# Altium PCB PCB1.PcbDoc
Units mm, origin at the board's own origin, x right, y up, seen from the top; angles counter-clockwise.
Board outline 47.79 x 53 mm, 2 copper layers (Top Layer, Bottom Layer); 28 components, 36 nets, 120 pads, 8 vias.
Unrouted connection lines stored in the file: 3.
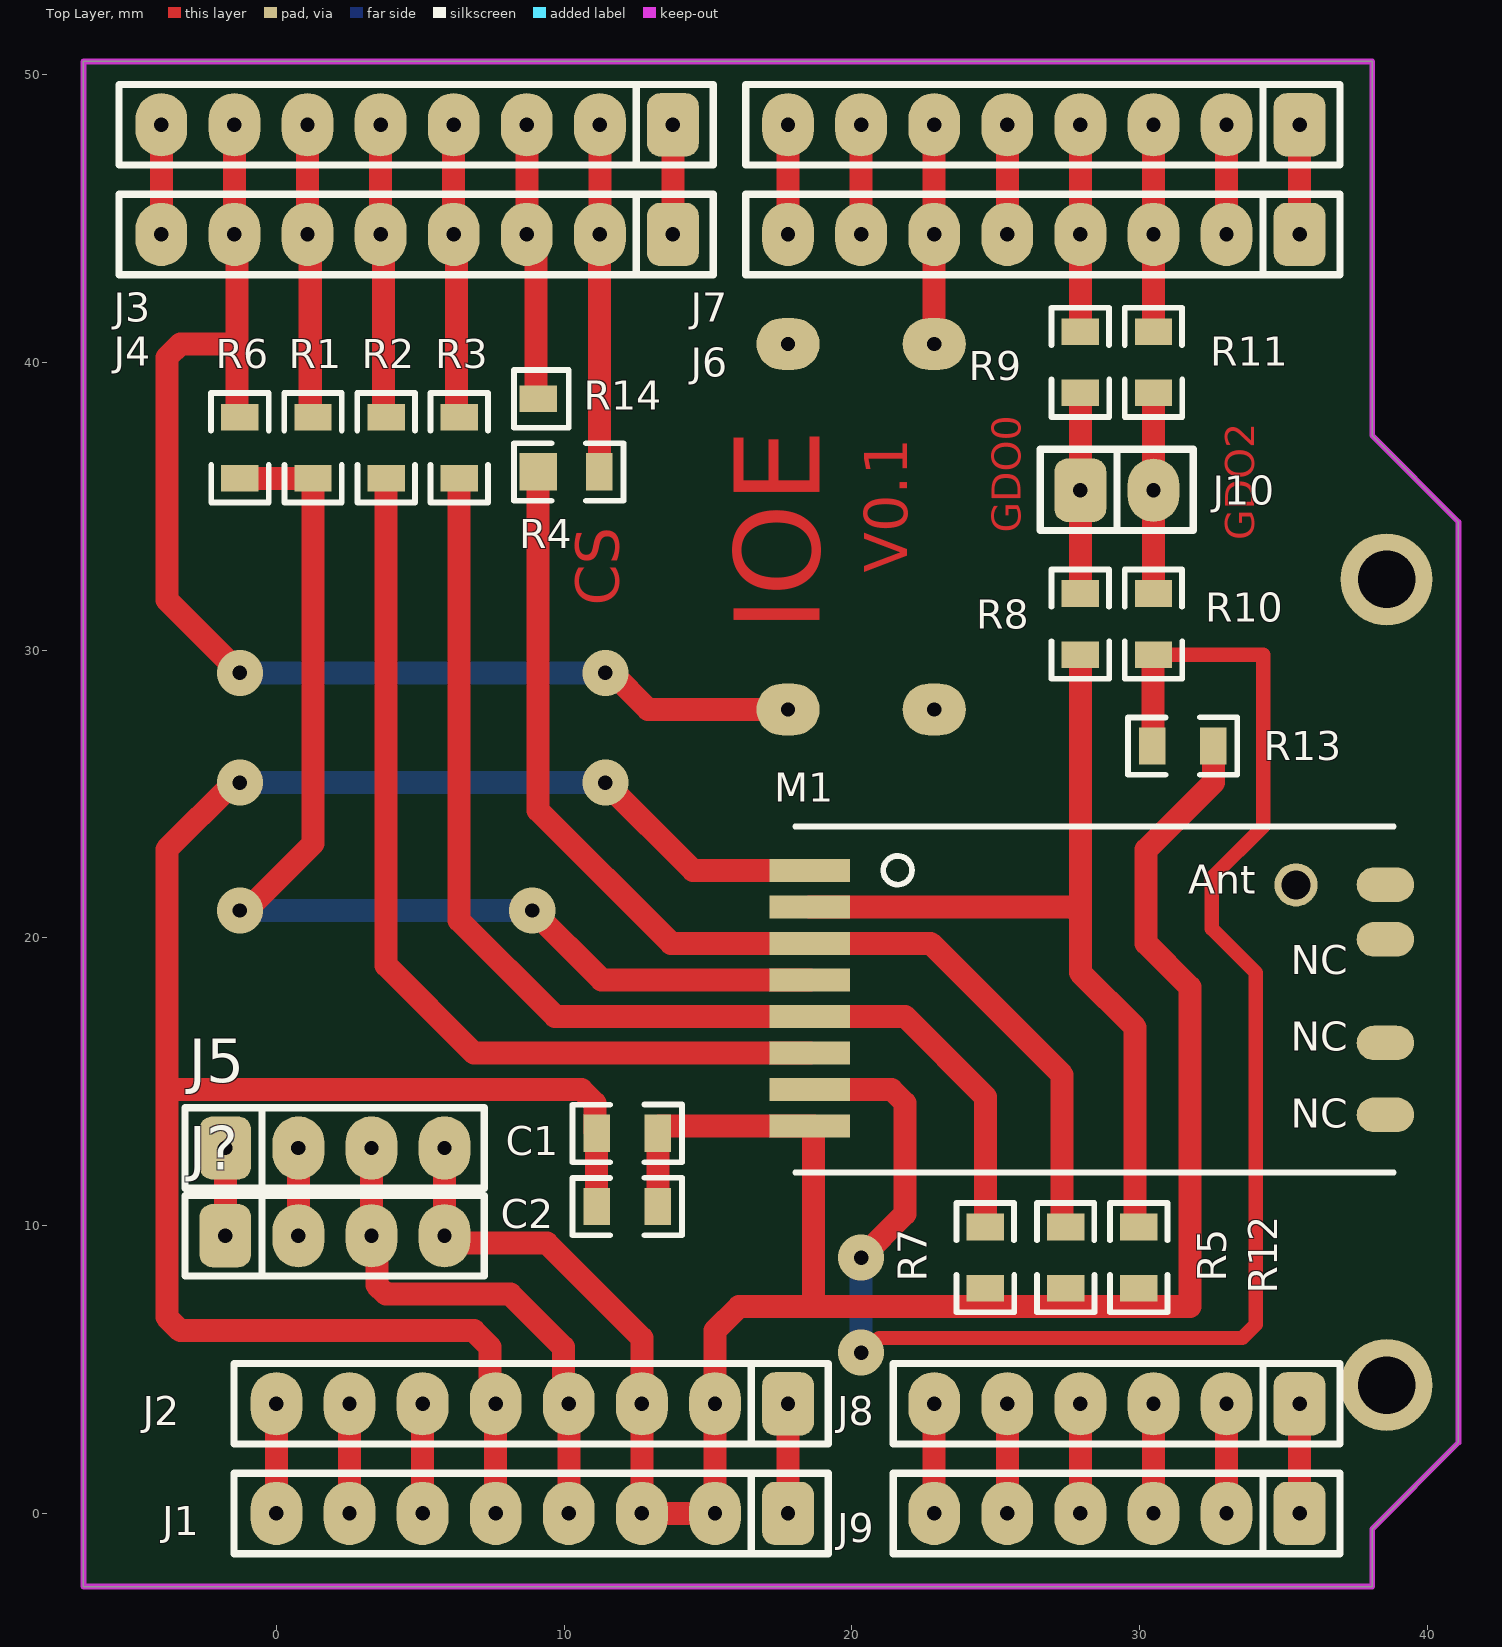
[diagram p0: Top Layer view]
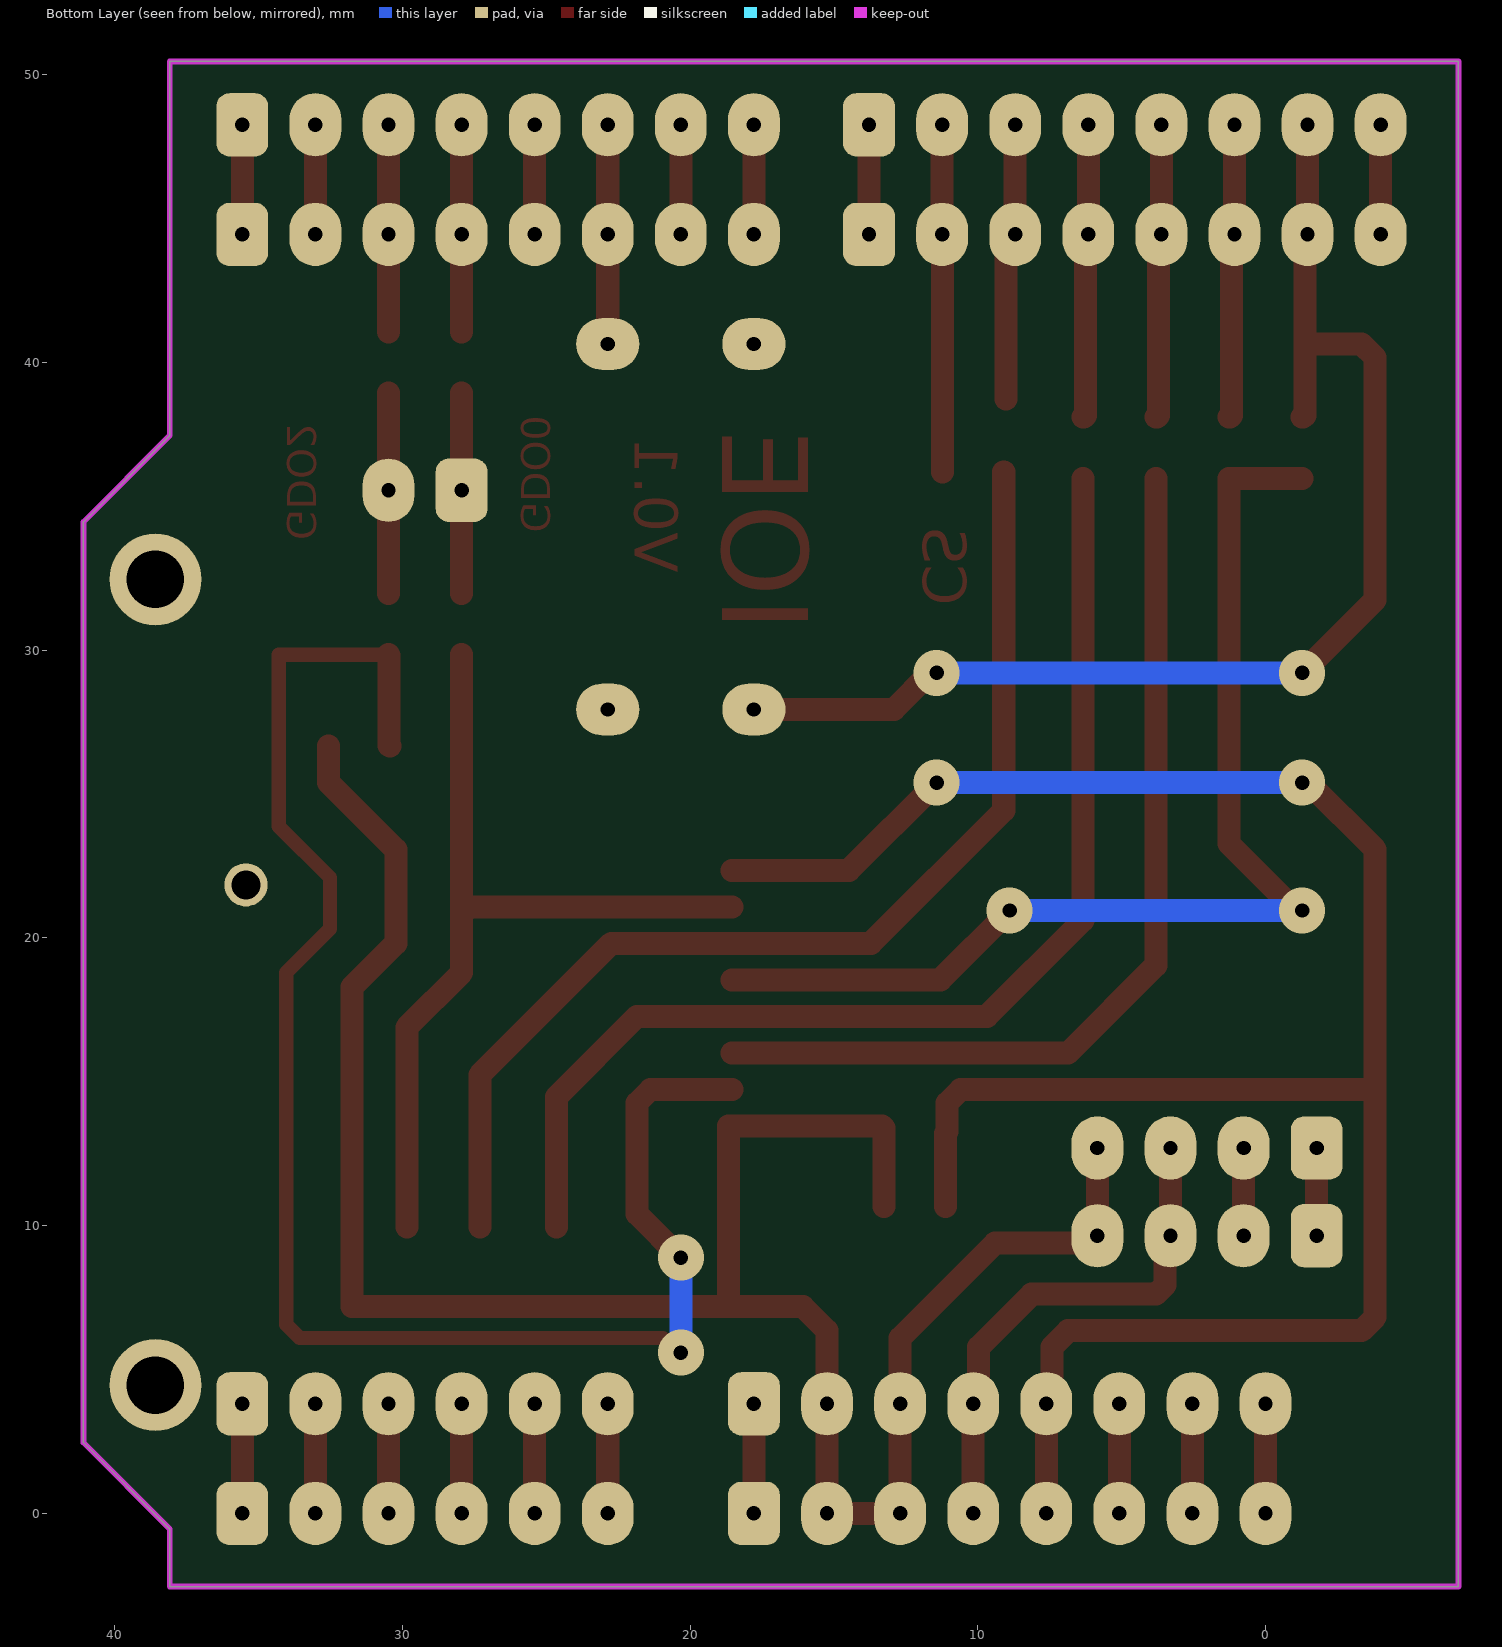
[diagram p1: Bottom Layer view, seen from below]
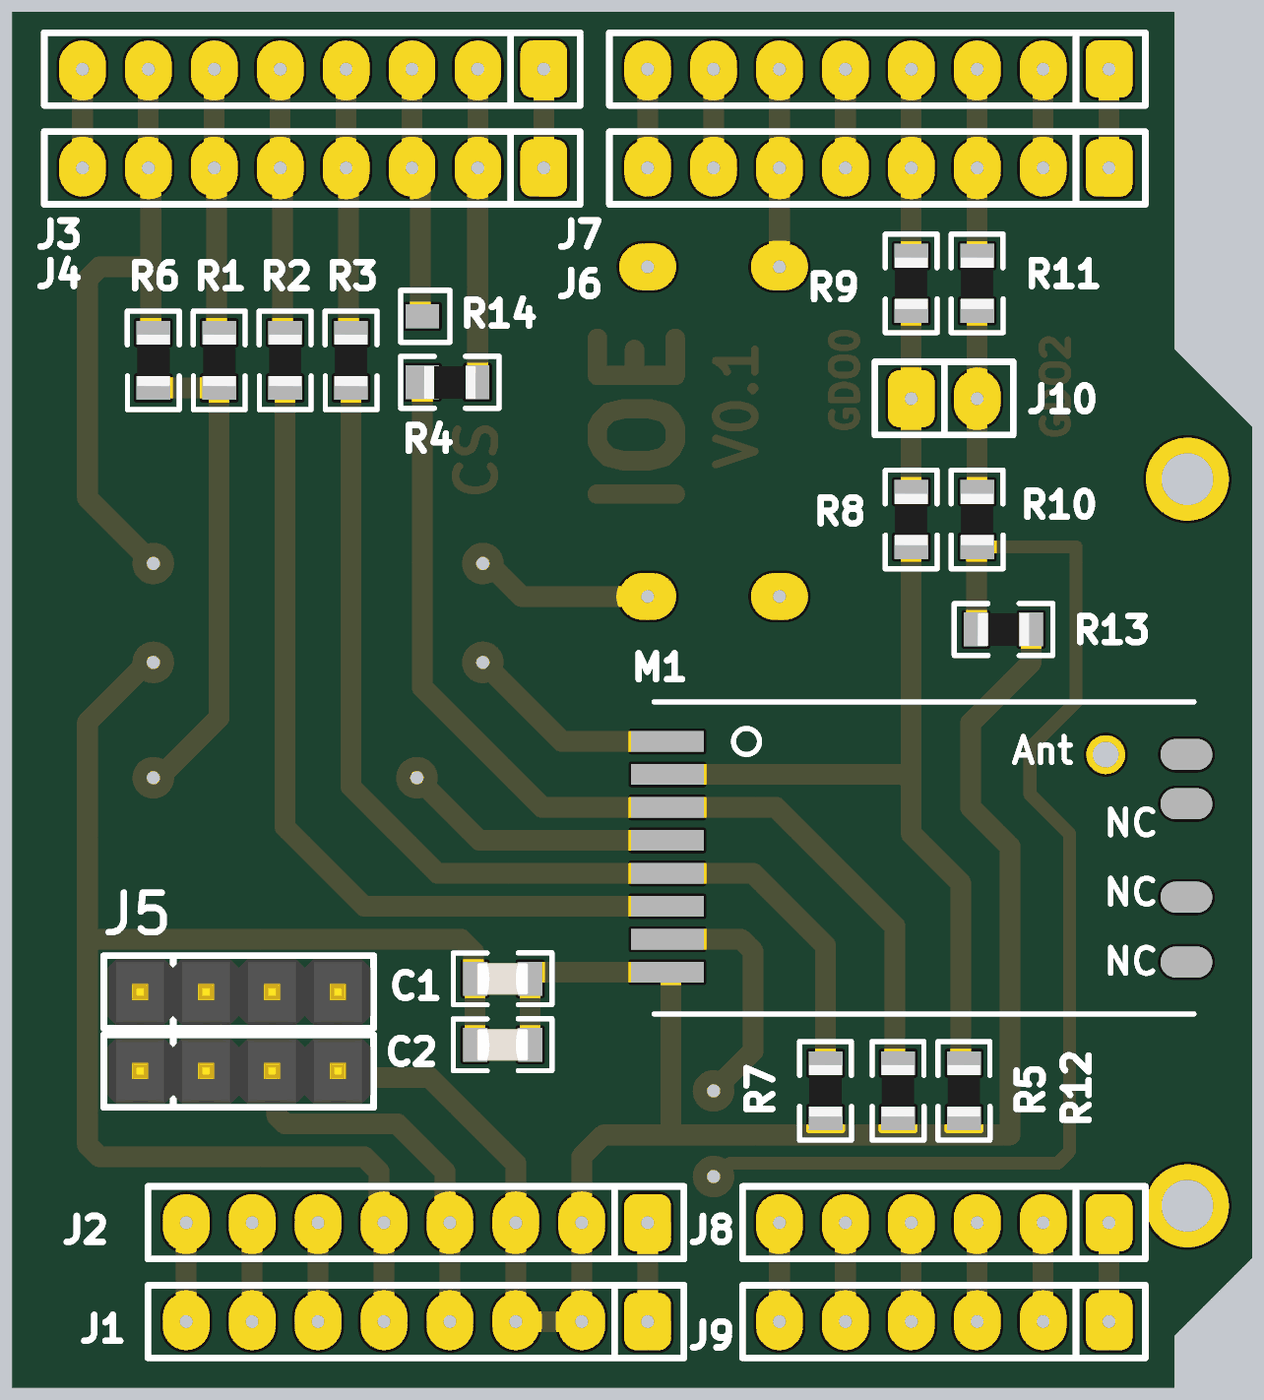
[diagram p2: 3D render of the assembled board from above, using the file's embedded part models]

## Layer stack, top to bottom
Top Solder: solder mask 0.0102, Solder Resist, Dk 3.5
Top Layer: signal copper 0.0356
Dielectric 1: dielectric 0.32, FR-4, Dk 4.8
Bottom Layer: signal copper 0.0356
Bottom Solder: solder mask 0.0102, Solder Resist, Dk 3.5

## Board outline
-6.706,-2.54 38.08,-2.54 38.08,-0.54 41.08,2.46 41.08,34.46 38.08,37.46 38.08,50.46 -6.706,50.46

## Design rules (kind name [scope] priority, off if disabled: settings)
Clearance [All] p1: gap=0.254 ignorepadtopadclearanceinfootprint=FALSE except(0: Arc-Hole Track-Hole SMDPad-Hole THPad-Hole Via-Hole Fill-Hole Poly-Hole Region-Hole Text-Hole)
HoleSize [All] p1: absolutevalues=TRUE maxlimit=10 minlimit=0.2 maxpercent=80.000 minpercent=20.000
PolygonConnect [All] p1: connectstyle=Relief reliefconductorwidth=0.254 reliefentries=4 polygonreliefangle="90 Angle" airgapwidth=0.254
RoutingVias [All] p1: holewidth=0.711 width=1.27 viastyle="Through Hole" minholewidth=0.5 minwidth=0.5 maxholewidth=1.2 maxwidth=4
SolderMaskExpansion [All] p1: expansion=0.102 istentingtop=FALSE
Width [All] p1: maxlimit=10 minlimit=0.5 preferedwidth=0.8
29 further rules are at their usual default settings.

## Components (designator, comment, footprint, x,y, rotation, side; value= is the part's Value field where it differs from the comment)
C1 "100nF" C-0805 12.192,13.208 r0 top
C2 "100nF" C-0805 12.192,10.668 r0 top
J1 "8" PH-1X8 17.78,0 r180 top
J2 "8" PH-1X8 17.78,3.81 r180 top
J3 "8" PH-1X8 13.78,48.26 r180 top
J4 "8" PH-1X8 13.78,44.45 r180 top
J5 "LCD" PH-1X4 -1.778,12.7 r0 top
J6 "8" PH-1X8 35.56,44.45 r180 top
J7 "8" PH-1X8 35.56,48.26 r180 top
J8 "Header 6" PH-1X6 35.56,3.81 r180 top
J9 "Header 6" PH-1X6 35.56,0 r180 top
J10 "Header 2" PH-1X2-N3D 27.94,35.56 r0 top
J? "LCD" PH-1X4 -1.778,9.652 r0 top
M1 "CC1101 Module" CC1101-Module-Red 18.542,22.352 r0 top
R1 "RES" R-0805#1 1.27,37.038 r90 top
R2 "RES" R-0805#1 3.81,37.038 r90 top
R3 "RES" R-0805#1 6.35,37.038 r90 top
R4 "RES" R-0805#2 10.16,36.195 r0 top
R5 "RES" R-0805#1 27.432,8.89 r270 top
R6 "RES" R-0805#1 -1.27,37.038 r90 top
R7 "RES" R-0805#1 24.638,8.89 r270 top
R8 "RES" R-0805#1 27.94,30.907 r270 top
R9 "RES" R-0805#1 27.94,40.005 r270 top
R10 "RES" R-0805#1 30.48,30.907 r270 top
R11 "RES" R-0805#1 30.48,40.005 r270 top
R12 "RES" R-0805#1 29.972,8.89 r270 top
R13 "RES" R-0805#1 31.496,26.67 r0 top
R14 "RES" R-0805#3 10.16,38.735 r180 top

## Footprints (in the part's own frame and the unit in brackets; to place one, negate y for a bottom-side part, rotate by r counter-clockwise, add the part's x,y. Pads: shape width x height; smd on the part's side, far side on the other; paste and mask are expansions set on the pad)
C-0805 [mm] "Multilayer Chip Capacitors - General"
  rect 0.925x1.3 smd: 1(-1.062,0) 2(1.062,0)
  silkscreen extent -1.9,-1 1.9,1, body extent -1,-0.63 1,0.62, height 0.81
CC1101-Module-Red [mm]
  rect 2.8x0.8 smd: 1(0,0) 2(0,-1.27) 3(0,-2.54) 4(0,-3.81) 5(0,-5.08) 6(0,-6.35) 7(0,-7.62) 8(0,-8.89)
  round 1.5 hole 1: 9(16.891,-0.508)
  oval 2x1.2 smd: 9(20,-0.5) 10(20,-2.4) 11(20,-6) 12(20,-8.5)
  silkscreen extent -0.51,-10.5 20.29,1.52, body extent -0.51,-10.5 20.32,1.5, height 2
PH-1X2-N3D [mm] "2.54mm"
  rrect50% 1.8x2.2 hole 0.5 mask+0.102: 1(0,0)
  oval 1.8x2.2 hole 0.5 mask+0.102: 2(2.54,0)
  silkscreen extent -1.4,-1.4 3.93,1.43
PH-1X4 [mm] "2.54mm"
  rrect50% 1.8x2.2 hole 0.5: 1(0,0)
  oval 1.8x2.2 hole 0.5 mask+0.102: 2(2.54,0) 3(5.08,0) 4(7.62,0)
  silkscreen extent -1.4,-1.4 9,1.4, body extent -1.27,-1.27 8.89,1.27, height 9.5
PH-1X6 [mm] "2.54mm"
  rrect50% 1.8x2.2 hole 0.5: 1(0,0)
  oval 1.8x2.2 hole 0.5 mask+0.102: 2(2.54,0) 3(5.08,0) 4(7.62,0) 5(10.16,0) 6(12.7,0)
  silkscreen extent -1.4,-1.4 14.12,1.4
PH-1X8 [mm] "2.54mm"
  rrect50% 1.8x2.2 hole 0.5: 1(0,0)
  oval 1.8x2.2 hole 0.5 mask+0.102: 2(2.54,0) 3(5.08,0) 4(7.62,0) 5(10.16,0) 6(12.7,0) 7(15.24,0) 8(17.78,0)
  silkscreen extent -1.4,-1.4 19.25,1.4
R-0805#1 [mm]
  rect 0.925x1.3 smd: 1(-1.062,0) 2(1.062,0)
  silkscreen extent -1.9,-1 1.9,1, body extent -1,-0.63 1,0.62, height 0.5
R-0805#2 [mm]
  rect 1.3x1.3 smd: 1(-1.062,0)
  rect 0.925x1.3 smd: 2(1.062,0)
  silkscreen extent -1.9,-1 1.9,1, body extent -1,-0.63 1,0.62, height 0.5
R-0805#3 [mm]
  rect 1.3x0.92 smd: 2(1.062,0)
  silkscreen extent 0,-1 1.9,1

## Part data
C1 C2: library part CAP, "CAPACITOR BIPOLAR"
J1 J2 J3 J4 J6 J7: library part PH-1X8, "PIN HEADER 1x8 2.56mm"
J5 J?: library part PH-1X4, "PIN HEADER 1x4 2.56mm"
J8 J9: library part PH-1X6, "PIN HEADER 1x6 2.56mm"
J10: library part PH-1X2, "PIN HEADER 1x2 2.56mm"
M1: library part HW-863, "CC1101 Module Red", Central frequency band=433MHz, Color=Red, Emission current=29mA, Maximum power=10mW, Package type="patch / plug-in 1*8*1.27 SIP", Voltage=1.8-3.6V, Chip=CC1101, Size=12*20.8

## Free pads (board coordinates)
  round 3.2 hole 2 unplated: 0(38.58,4.46) 0(38.58,32.46)
  oval 2.2x1.8 hole 0.5: 2(22.86,40.64) 3(17.78,40.64) 4(17.78,27.94) 5(22.86,27.94)

## Via types
v1: diameter 1.6, hole 0.5, Top Layer to Bottom Layer, 8 vias

## Nets (pads, with @x,y where several pads share a name; then routed paths per layer and width w, separated by ;. In a path a pad name is that pad's centre, name@x,y a point inside that pad or via, vN(x,y) a via of type N, cw(c..) or ccw(c..) an arc to the next point about the centre after c; other vN are vias at no path point)
+5: J1.4 J2.4 J5.3 J?.3 | length 18.1
  Top Layer w0.8: J5.3 J?.3 3.493,9.461 3.493,7.937 3.81,7.62 8.128,7.62 9.969,5.779 9.969,4.001 J2.4 J1.4
GND: C1.2 C2.2 J1.2 J1.3 J2.2 J2.3 J3.7 J4.7 J5.4 J?.4 M1.8 pad.4 R5.2 R6.2 R7.2 R12.2 R13.2 | length 123.3
  Top Layer w0.8: J3.7 J4.7 -1.365,44.355 -1.365,40.64 ; v1(-1.27,29.21) -3.81,31.75 -3.81,40.171 -3.341,40.64 -1.365,40.64 ; R6.2 -1.302,38.1 -1.365,38.162 -1.365,40.64 ; J5.4 J?.4 6.096,9.398 9.398,9.398 12.7,6.096 J2.3 J1.3 J1.2 J2.2 15.24,6.35 16.083,7.193 18.415,7.193 ; v1(11.43,29.21) 11.646,29.21 12.916,27.94 pad.4 ; C2.2 C1.2 13.254,13.396 13.321,13.462 M1.8 18.669,13.462 18.669,7.447 18.415,7.193 ; R13.2 32.558,25.4 30.226,23.068 30.226,19.812 31.75,18.288 31.75,7.193 18.415,7.193
  Bottom Layer w0.8: v1(-1.27,29.21) v1(11.43,29.21)
MISO: M1.6 R2.1 | length 32.9
  Top Layer w0.8: R2.1 3.81,19.05 6.858,16.002 M1.6
MOSI: M1.5 R3.1 R7.1 | length 40.7
  Top Layer w0.8: R3.1 6.35,20.607 9.685,17.272 M1.5 21.844,17.272 24.638,14.478 R7.1
NetJ1_1: J1.1 J2.1 | length 3.8
  Top Layer w0.8: J1.1 J2.1
NetJ1_6: J1.6 J2.6 | length 3.8
  Top Layer w0.8: J1.6 J2.6
NetJ1_7: J1.7 J2.7 | length 3.8
  Top Layer w0.8: J1.7 J2.7
NetJ1_8: J1.8 J2.8 | length 3.8
  Top Layer w0.8: J1.8 J2.8
NetJ3_1: J3.1 J4.1 | length 3.8
  Top Layer w0.8: J4.1 J3.1
NetJ3_2: J3.2 J4.2 R4.2 | length 12.1
  Top Layer w0.8: R4.2 11.231,36.204 J4.2@11.231,44.441 ; J4.2 J3.2
NetJ3_3: J3.3 J4.3 R14.2 | length 9.7
  Top Layer w0.8: J3.3 8.7,43.979 9.017,43.662 R14.2@9.017,38.735
NetJ3_4: J3.4 J4.4 R3.2 | length 10.3
  Top Layer w0.8: J3.4 J4.4 6.255,44.355 6.255,38.162 6.318,38.1 R3.2
NetJ3_5: J3.5 J4.5 R2.2 | length 10.3
  Top Layer w0.8: J3.5 J4.5 3.715,44.355 3.715,38.162 3.778,38.1 R2.2
NetJ3_6: J3.6 J4.6 R1.2 | length 10.3
  Top Layer w0.8: J3.6 J4.6 1.175,44.355 1.175,38.162 1.238,38.1 R1.2
NetJ3_8: J3.8 J4.8 | length 3.8
  Top Layer w0.8: J4.8 J3.8
NetJ6_1: J6.1 J7.1 | length 3.8
  Top Layer w0.8: J6.1 J7.1
NetJ6_2: J6.2 J7.2 | length 3.8
  Top Layer w0.8: J6.2 J7.2
NetJ6_3: J6.3 J7.3 R11.1 | length 7.2
  Top Layer w0.8: R11.1 J6.3 J7.3
NetJ6_4: J6.4 J7.4 R9.1 | length 7.2
  Top Layer w0.8: R9.1 J6.4 J7.4
NetJ6_5: J6.5 J7.5 | length 3.8
  Top Layer w0.8: J6.5 J7.5
NetJ6_6: J6.6 J7.6 pad.2 | length 7.6
  Top Layer w0.8: pad.2 J6.6 J7.6
NetJ6_7: J6.7 J7.7 | length 3.8
  Top Layer w0.8: J6.7 J7.7
NetJ6_8: J6.8 J7.8 | length 3.8
  Top Layer w0.8: J6.8 J7.8
NetJ8_3: J8.3 J9.3 | length 3.8
  Top Layer w0.8: J9.3 J8.3
NetJ8_4: J8.4 J9.4 | length 3.8
  Top Layer w0.8: J9.4 J8.4
NetJ8_5: J8.5 J9.5 | length 3.8
  Top Layer w0.8: J9.5 J8.5
NetJ8_6: J8.6 J9.6 | length 3.8
  Top Layer w0.8: J9.6 J8.6
NetJ10_1: J10.1 R8.1 R9.2 | length 7
  Top Layer w0.8: R8.1 J10.1 R9.2
NetJ10_2: J10.2 R10.1 R11.2 | length 7
  Top Layer w0.8: R10.1 J10.2 R11.2
NetM1_2: M1.2 R8.2 R12.1 | length 30.2
  Top Layer w0.8: M1.2 27.686,21.082 27.94,20.828 ; R8.2 27.94,20.828 ; R12.1@29.845,9.952 29.845,16.891 27.94,18.796 27.94,20.828
NetM1_7: M1.7 R10.2 R13.1 | length 58.6
  Top Layer w0.5: v1(20.32,5.588) 20.447,5.588 20.955,6.096 33.567,6.096 34.036,6.565 34.036,18.796 32.512,20.32 32.512,22.098 34.29,23.876 34.29,29.845 R10.2
  Top Layer w0.8: M1.7 21.375,14.732 21.844,14.263 21.844,10.414 v1(20.32,8.89) ; R13.1 30.457,26.693 30.457,29.822 R10.2
  Bottom Layer w0.8: v1(20.32,5.588) v1(20.32,8.89)
SCK: M1.4 R1.1 R6.1 | length 39.6
  Top Layer w0.8: v1(-1.27,20.955) -1.054,20.955 1.27,23.279 R1.1 R6.1 ; v1(8.89,20.955) 11.303,18.542 M1.4
  Bottom Layer w0.8: v1(-1.27,20.955) v1(8.89,20.955)
SCL: J5.2 J8.1 J9.1 J?.2 | length 6.9
  Top Layer w0.8: J?.2 J5.2 ; J9.1 J8.1
SDA: J5.1 J8.2 J9.2 J?.1 | length 6.9
  Top Layer w0.8: J?.1 J5.1 ; J9.2 J8.2
SS: M1.3 R4.1 R5.1 | length 39.1
  Top Layer w0.8: R4.1 9.098,24.43 13.716,19.812 M1.3 22.733,19.812 27.305,15.24 R5.1@27.305,9.952
VCC: C1.1 C2.1 J1.5 J2.5 M1.1 | length 77.1
  Top Layer w0.8: v1(-1.27,25.4) -1.486,25.4 -3.81,23.076 -3.81,14.732 ; J1.5 J2.5 7.429,4.001 7.429,5.779 6.858,6.35 -3.341,6.35 -3.81,6.819 -3.81,14.732 ; C2.1 C1.1 11.067,13.27 11.067,14.263 10.598,14.732 -3.81,14.732 ; v1(11.43,25.4) 14.478,22.352 M1.1
  Bottom Layer w0.8: v1(-1.27,25.4) v1(11.43,25.4)
pads on no net: M1.9 M1.10 M1.11 M1.12

## Keep-outs
Keep-Out Layer:
  the board outline again, w0.2

## Other copper
Top Layer:
  text "GDO0" at 25.862,34.082 h1 r90
  text "GDO2" at 33.99,33.828 h1 r90
  text "V0.1" at 21.925,32.685 h1.5 r90
  text "CS" at 11.892,31.542 h1.5 r90
  text "IOE" at 18.885,30.645 h3 r90

## Text inside footprints (layer, text, board x,y; h text height)
M1: Top Overlay "NC" at 35.252,13.408 h1; Top Overlay "NC" at 35.252,16.075 h1; Top Overlay "NC" at 35.252,18.742 h1; Top Overlay "Ant" at 31.696,21.536 h1